# EAGLE board Ink-Board (EAGLE 9.7.0)
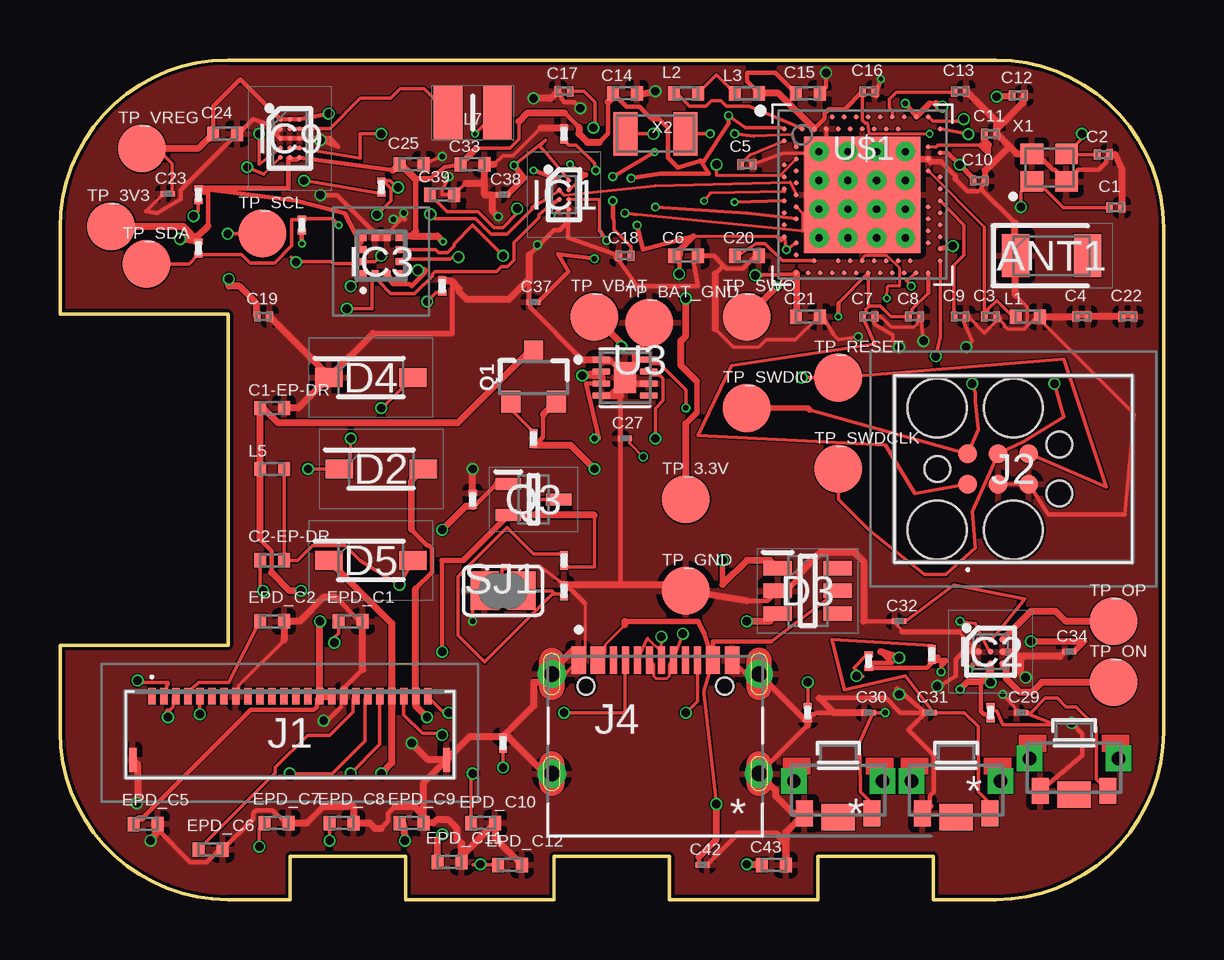
[diagram p0: board, top side]
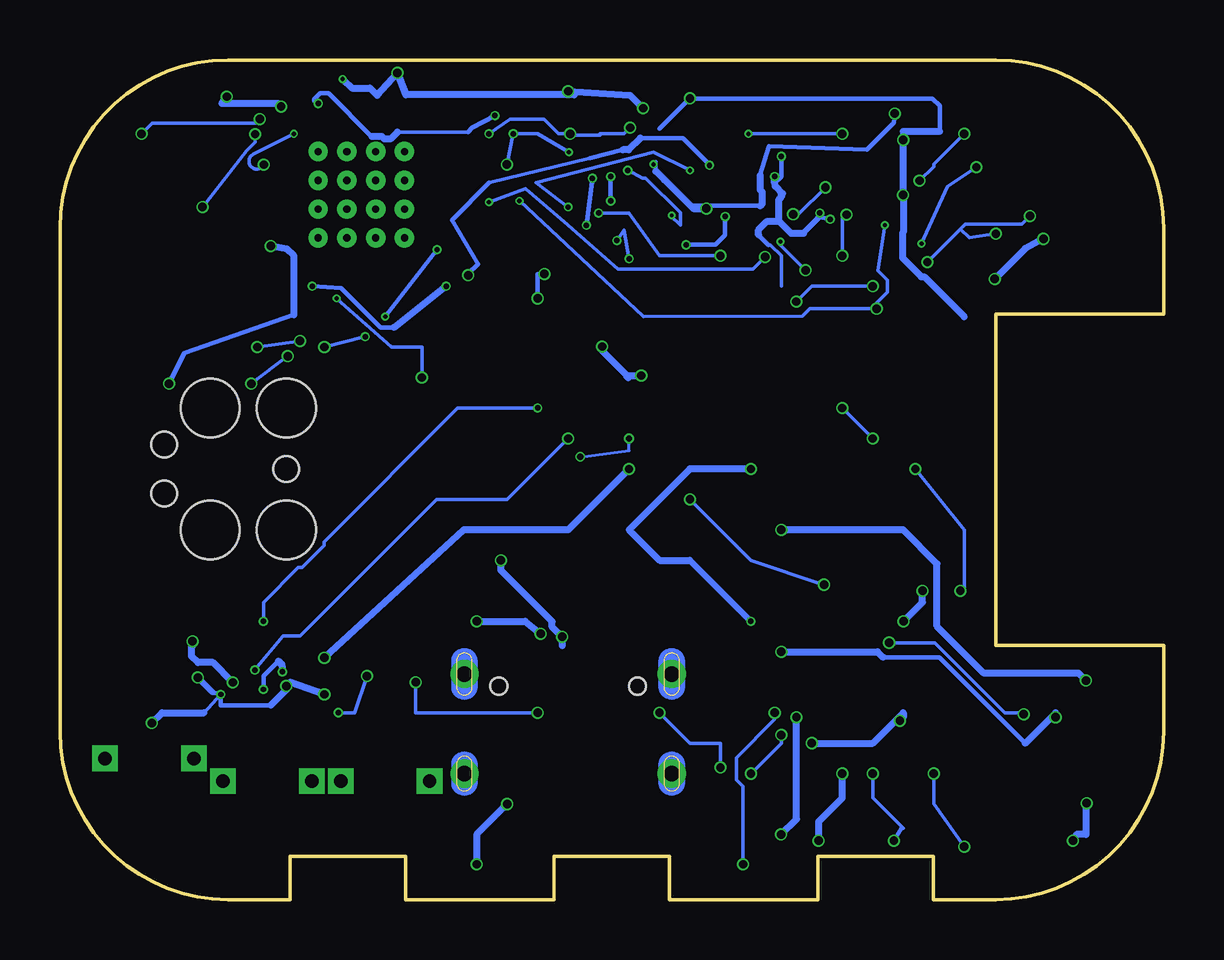
[diagram p1: board, bottom side, seen from below]

Size 46 x 35 mm. Coordinates in mm from the lower left corner, seen from the top.
Outline: 39,0 36.4,0 36.4,1.8 31.6,1.8 31.6,0 25.4,0 25.4,1.8 20.6,1.8 20.6,0 14.4,0 14.4,1.8 9.6,1.8 9.6,0 7,0 arc-90 0,7 0,10.6 7,10.6 7,24.4 0,24.4 0,28 arc-90 7,35 39,35 arc-90 46,28 46,7 arc-90 39,0
Copper layers (1*16): Top 0.035mm / dielectric 1.6mm / Bottom 0.035mm
Design rules "jlcpcb-2layers.dru": minimum track width 5mil, minimum drill 5mil, track to track 2mil, track to pad 0.000003125mm, pad to pad 5mil, via to via 5mil, smd to smd 5mil, copper to edge 5mil, drill to drill 6mil, minimum pad ring 10mil, minimum via ring 3mil, stop-mask expansion 4mil, vias tented up to drill 0mil, thermal gap 10mil

## Footprints (pad centres in the part's own frame; a part is rotated, then mirrored left to right if it is on the bottom)
2450AT18B100E_ANTC3216X140N = smd 1.15 x 1.8: 1 -1.5,0; 2 1.5,0
NORDIC_NRF_3_RESC0201_L = smd 0.28 x 0.43: 1 -0.255,0; 2 0.255,0
NORDIC_NRF_3_RESC0402_L = smd 0.5 x 0.6: 1 -0.5,0; 2 0.5,0
GRM011R60J152KE01L_2_CAPC0201X13N = smd 0.22 x 0.23: 1 -0.185,0; 2 0.185,0
ESP32_C6_LIBRARY_5_SOD3716X135N = smd 1.15 x 0.8: 1 -1.75,0; 2 1.75,0
ESP32_C6_LIBRARY_3_SOT95P280X145-6N = smd 1.2 x 0.6: 1 -1.25,0.95; 2 -1.25,0; 3 -1.25,-0.95; 4 1.25,-0.95; 5 1.25,0; 6 1.25,0.95
BQ25180YBGR_BGA8C40P2X4_100X155X50 = smd 0.2 x 0.2: A1 -0.2,0.6; A2 0.2,0.6; B1 -0.2,0.2; B2 0.2,0.2; C1 -0.2,-0.2; C2 0.2,-0.2; D1 -0.2,-0.6; D2 0.2,-0.6
DRV2605YZFR_BGA9C50P3X3_144X144X62 = smd 0.25 x 0.25: A1 -0.5,0.5; A2 0,0.5; A3 0.5,0.5; B1 -0.5,0; B2 0,0; B3 0.5,0; C1 -0.5,-0.5; C2 0,-0.5; C3 0.5,-0.5
BMA423_BMA423 = smd 0.3 x 0.35: 1 -0.75,-0.775; 2 -0.25,-0.775; 3 0.25,-0.775; 4 0.75,-0.775; 7 0.75,0.775; 8 0.25,0.775; 9 -0.25,0.775; 10 -0.75,0.775 | smd 0.35 x 0.3: 5 0.775,-0.25; 6 0.775,0.25; 11 -0.775,0.25; 12 -0.775,-0.25
RT6160AWSC_BGA15C40P3X5_140X230X60 = smd 0.216 x 0.216: A1 -0.4,0.8; A2 0,0.8; A3 0.4,0.8; B1 -0.4,0.4; B2 0,0.4; B3 0.4,0.4; C1 -0.4,0; C2 0,0; C3 0.4,0; D1 -0.4,-0.4; D2 0,-0.4; D3 0.4,-0.4; E1 -0.4,-0.8; E2 0,-0.8; E3 0.4,-0.8
503480-2400_5034802400 = smd 0.3 x 0.7: 1 -5.75,1.525; 2 -5.25,1.525; 3 -4.75,1.525; 4 -4.25,1.525; 5 -3.75,1.525; 6 -3.25,1.525; 7 -2.75,1.525; 8 -2.25,1.525; 9 -1.75,1.525; 10 -1.25,1.525; 11 -0.75,1.525; 12 -0.25,1.525; 13 0.25,1.525; 14 0.75,1.525; 15 1.25,1.525; 16 1.75,1.525; 17 2.25,1.525; 18 2.75,1.525; 19 3.25,1.525; 20 3.75,1.525; 21 4.25,1.525; 22 4.75,1.525; 23 5.25,1.525; 24 5.75,1.525 | smd 0.3 x 1: MP1 -6.54,-1.125; MP2 6.54,-1.125
TC2030-IDC_TC2030IDC = smd 0.783 x 0.783: 1 -0.953,-0.635; 2 -0.953,0.635; 3 0.317,-0.635; 4 0.317,0.635; 5 1.588,-0.635; 6 1.588,0.635 | hole 2.451: -2.223,-2.54; -2.223,2.54; 0.952,-2.54; 0.952,2.54 | hole 1.067: -2.223,0; 2.857,-1.016; 2.857,1.016
KH-TYPE-C-16P_KINGHELM_KH-TYPE-C-16P = smd 0.6 x 1.15: A1_B12 -3.2,4.725; A4_B9 -2.4,4.725; A9_B4 2.4,4.725; A12_B1 3.2,4.725 | smd 0.3 x 1.15: A5 -1.25,4.725; A6 -0.25,4.725; A7 0.25,4.725; A8 1.25,4.725; B5 1.75,4.725; B6 0.75,4.725; B7 -0.75,4.725; B8 -1.75,4.725 | drill 0.65 pad 1.05: SH1 -4.32,0; SH2 4.32,0; SH3 -4.32,4.15; SH4 4.32,4.15 | hole 0.7: -2.89,3.65; 2.89,3.65
NORDIC_NRF_2_RESC0402_L = smd 0.5 x 0.6: 1 -0.5,0; 2 0.5,0
MLP2016SR47MT0S1_INDC2016X100N = smd 1.2 x 2.2: 1 -1.028,0; 2 1.028,0
ESP32_C6_LIBRARY_4_ESP32_C6_LIBRARY_4_ESP32_C6_LIBRARY_4_ESP32_C6_LIBRARY_4_ESP32_WROVER_SPARKFUN-DISCRETESEMI_SOT23-3 = smd 0.8 x 0.9: 1 -0.95,-1; 2 0.95,-1; 3 0,1.1
ESP32_C6_LIBRARY_6_SOT65P210X110-3N = smd 1.05 x 0.5: 1 -1.05,0.65; 2 -1.05,-0.65; 3 1.05,0
CPF0201D7K68C1_0201 = smd 0.35 x 0.25: 1 0,0.275; 2 0,-0.275
ESP32_C6_LIBRARY_7_JUMPER_SJ = smd 1.168 x 1.6: 1 -0.762,0; 2 0.762,0
2025-10-22_07-23-44_LIBRARY_SW_EVP-AKE31A_PAN = smd 0.711 x 1.092: 1 -1.4,-0.972; 2 1.4,-0.972 | drill 0.559 pad 0.914 square: 3 -1.848,0.381; 4 1.848,0.381 | smd 1.397 x 1.092: 5 0,-1.124
HECTOR_WATCH_1_TP20R = smd 2 x 2: TP 0,0
ESP32_C6_LIBRARY_SON50P200X200X80-9N = smd 0.76 x 0.27: 1 -0.985,0.75; 2 -0.985,0.25; 3 -0.985,-0.25; 4 -0.985,-0.75; 5 0.985,-0.75; 6 0.985,-0.25; 7 0.985,0.25; 8 0.985,0.75 | smd 0.9 x 1.3: 9 0,0
NORDIC_NRF_4_AQFN50P700X700X85_HS-74N = smd 4.85 x 4.85: P$74 0,0 | drill 0.3 pad 0.6: P$75 -1.8,1.8; P$76 -0.6,1.8; P$77 0.6,1.8; P$78 1.8,1.8; P$79 -1.8,0.6; P$80 -0.6,0.6; P$81 0.6,0.6; P$82 1.8,0.6; P$83 -1.8,-0.6; P$84 -0.6,-0.6; P$85 0.6,-0.6; P$86 1.8,-0.6; P$87 -1.8,-1.8; P$88 -0.6,-1.8; P$89 0.6,-1.8; P$90 1.8,-1.8 | smd 0.2 x 0.2: P$A8 -1.25,3.25; P$A10 -0.75,3.25; P$A12 -0.25,3.25; P$A14 0.25,3.25; P$A16 0.75,3.25; P$A18 1.25,3.25; P$A20 1.75,3.25; P$A22 2.25,3.25; P$A23 2.75,3.25; P$AA24 3.25,-2.25; P$AB2 -2.75,-2.5; P$AC5 -2,-2.75; P$AC9 -1,-2.75; P$AC11 -0.5,-2.75; P$AC13 0,-2.75; P$AC15 0.5,-2.75; P$AC17 1,-2.75; P$AC19 1.5,-2.75; P$AC21 2,-2.75; P$AC24 3.25,-2.75; P$AD2 -2.75,-3.25; P$AD4 -2.25,-3.25; P$AD6 -1.75,-3.25; P$AD8 -1.25,-3.25; P$AD10 -0.75,-3.25; P$AD12 -0.25,-3.25; P$AD14 0.25,-3.25; P$AD16 0.75,-3.25; P$AD18 1.25,-3.25; P$AD20 1.75,-3.25; P$AD22 2.25,-3.25; P$AD23 2.75,-3.25; P$B1 -3.25,2.75; P$B3 -2.5,2.75; P$B5 -2,2.75; P$B7 -1.5,2.75; P$B9 -1,2.75; P$B11 -0.5,2.75; P$B13 0,2.75; P$B15 0.5,2.75; P$B17 1,2.75; P$B19 1.5,2.75; P$B24 3.25,2.75; P$C1 -3.25,2.25; P$D2 -2.75,2; P$D23 2.75,2; P$E24 3.25,1.75; P$F2 -2.75,1.5; P$F23 2.75,1.5; P$G1 -3.25,1.25; P$H2 -2.75,1; P$H23 2.75,1; P$J1 -3.25,0.75; P$J24 3.25,0.75; P$K2 -2.75,0.5; P$L1 -3.25,0.25; P$L24 3.25,0.25; P$M2 -2.75,0; P$N1 -3.25,-0.25; P$N24 3.25,-0.25; P$P2 -2.75,-0.5; P$P23 2.75,-0.5; P$R1 -3.25,-0.75; P$R24 3.25,-0.75; P$T2 -2.75,-1; P$T23 2.75,-1; P$U1 -3.25,-1.25; P$U24 3.25,-1.25; P$V23 2.75,-1.5; P$W1 -3.25,-1.75; P$W24 3.25,-1.75; P$Y2 -2.75,-2; P$Y23 2.75,-2
NORDIC_NRF_BT-XTAL_2016_N = smd 0.95 x 0.85: 1 -0.725,-0.575; 2 0.725,-0.575; 3 0.725,0.575; 4 -0.725,0.575
NORDIC_NRF_1_XTAL_3215_N = smd 1 x 1.8: 1 -1.25,0; 2 1.25,0

## Placement (x,y rotation side)
ANT1  2450AT18B100E  [2450AT18B100E_ANTC3216X140N]  41.33,26.84 0 top
C1  12pF  [NORDIC_NRF_3_RESC0201_L]  44.01,28.85 0 top
C1-EP-DR  10uF  [NORDIC_NRF_3_RESC0402_L]  8.84,20.49 0 top
C2  12pF  [NORDIC_NRF_3_RESC0201_L]  43.5,31.06 0 top
C2-EP-DR  4.7uF/25V  [NORDIC_NRF_3_RESC0402_L]  8.84,14.14 0 top
C3  1pF  [NORDIC_NRF_3_RESC0201_L]  38.79,24.3 0 top
C4  1pF  [NORDIC_NRF_3_RESC0201_L]  42.6,24.3 0 top
C5  100nF  [NORDIC_NRF_3_RESC0201_L]  28.63,30.65 0 top
C6  4.7μF  [NORDIC_NRF_3_RESC0402_L]  26.09,26.84 0 top
C7  100nF  [NORDIC_NRF_3_RESC0201_L]  33.71,24.3 0 top
C8  100nF  [NORDIC_NRF_3_RESC0201_L]  35.62,24.3 0 top
C9  820pF  [NORDIC_NRF_3_RESC0201_L]  37.52,24.3 0 top
C10  N.C.  [NORDIC_NRF_3_RESC0201_L]  38.31,29.97 0 top
C11  100pF  [NORDIC_NRF_3_RESC0201_L]  38.79,31.92 0 top
C12  100nF  [NORDIC_NRF_3_RESC0201_L]  39.95,33.52 0 top
C13  N.C.  [NORDIC_NRF_3_RESC0201_L]  37.52,33.69 0 top
C14  4.7μF  [NORDIC_NRF_3_RESC0402_L]  23.55,33.61 0 top
C15  1.0μF  [NORDIC_NRF_3_RESC0402_L]  31.17,33.61 0 top
C16  47nF  [NORDIC_NRF_3_RESC0201_L]  33.71,33.69 0 top
C17  12pF  [NORDIC_NRF_3_RESC0201_L]  21.01,33.69 0 top
C18  12pF  [NORDIC_NRF_3_RESC0201_L]  23.55,26.84 0 top
C19  100nF  [NORDIC_NRF_3_RESC0201_L]  8.49,24.3 0 top
C20  4.7μF  [NORDIC_NRF_3_RESC0402_L]  28.63,26.84 0 top
C21  4.7μF  [NORDIC_NRF_3_RESC0402_L]  31.17,24.3 0 top
C22  N.C.  [NORDIC_NRF_3_RESC0201_L]  44.51,24.3 0 top
C23  0.1uF  [GRM011R60J152KE01L_2_CAPC0201X13N]  4.5,29.42 0 top
C24  10uF  [NORDIC_NRF_3_RESC0402_L]  6.88,31.92 0 top
C25  22uF  [NORDIC_NRF_3_RESC0402_L]  14.66,30.65 0 top
C27  0.1uF  [GRM011R60J152KE01L_2_CAPC0201X13N]  23.55,19.22 0 top
C29  1uF  [GRM011R60J152KE01L_2_CAPC0201X13N]  40.06,7.79 0 top
C30  1uF  [GRM011R60J152KE01L_2_CAPC0201X13N]  33.71,7.79 0 top
C31  1uF  [GRM011R60J152KE01L_2_CAPC0201X13N]  36.25,7.79 0 top
C32  1uF  [GRM011R60J152KE01L_2_CAPC0201X13N]  34.98,11.6 0 top
C33  22uF  [NORDIC_NRF_3_RESC0402_L]  17.2,30.65 0 top
C34  0.1uF  [GRM011R60J152KE01L_2_CAPC0201X13N]  42.07,10.33 0 top
C37  1uF  [GRM011R60J152KE01L_2_CAPC0201X13N]  19.74,24.9 0 top
C38  1uF  [GRM011R60J152KE01L_2_CAPC0201X13N]  18.47,29.38 0 top
C39  10uF  [NORDIC_NRF_3_RESC0402_L]  15.93,29.38 0 top
C42  0.1uF  [GRM011R60J152KE01L_2_CAPC0201X13N]  26.79,1.44 0 top
C43  4.7uF  [NORDIC_NRF_3_RESC0402_L]  29.76,1.44 0 top
D2  MBR0530  [ESP32_C6_LIBRARY_5_SOD3716X135N]  13.39,17.95 0 top
D3  USBLC6-2SC6Y  [ESP32_C6_LIBRARY_3_SOT95P280X145-6N]  31.17,12.87 0 top
D4  MBR0530  [ESP32_C6_LIBRARY_5_SOD3716X135N]  12.96,21.76 0 top
D5  MBR0530  [ESP32_C6_LIBRARY_5_SOD3716X135N]  12.96,14.14 0 top
EPD_C1  1uF/50V  [NORDIC_NRF_3_RESC0402_L]  12.12,11.6 0 top
EPD_C2  1uF/50V  [NORDIC_NRF_3_RESC0402_L]  8.84,11.6 0 top
EPD_C5  0.1uF/50V  [NORDIC_NRF_3_RESC0402_L]  3.57,3.15 0 top
EPD_C6  1uF/50V  [NORDIC_NRF_3_RESC0402_L]  6.28,2.08 0 top
EPD_C7  1uF/50V  [NORDIC_NRF_3_RESC0402_L]  9.03,3.19 0 top
EPD_C8  1uF/50V  [NORDIC_NRF_3_RESC0402_L]  11.74,3.19 0 top
EPD_C9  1uF/50V  [NORDIC_NRF_3_RESC0402_L]  14.66,3.19 0 top
EPD_C10  1uF/50V  [NORDIC_NRF_3_RESC0402_L]  17.64,3.19 0 top
EPD_C11  1uF/50V  [NORDIC_NRF_3_RESC0402_L]  16.24,1.56 0 top
EPD_C12  1uF/50V  [NORDIC_NRF_3_RESC0402_L]  18.76,1.44 0 top
IC1  BQ25180YBGR  [BQ25180YBGR_BGA8C40P2X4_100X155X50]  21.01,29.38 0 top
IC2  DRV2605YZFR  [DRV2605YZFR_BGA9C50P3X3_144X144X62]  38.79,10.33 0 top
IC3  BMA423  [BMA423_BMA423]  13.39,26.84 0 top
IC9  RT6160AWSC  [RT6160AWSC_BGA15C40P3X5_140X230X60]  9.58,31.73 0 top
J1  503480-2400  [503480-2400_5034802400]  9.58,6.95 0 top
J2  TC2030-IDC  [TC2030-IDC_TC2030IDC]  38.79,17.95 0 top
J4  KH-TYPE-C-16P  [KH-TYPE-C-16P_KINGHELM_KH-TYPE-C-16P]  24.82,5.25 0 top
L1  3.9nH  [NORDIC_NRF_2_RESC0402_L]  40.35,24.3 0 top
L2  10μH  [NORDIC_NRF_2_RESC0402_L]  26.09,33.61 0 top
L3  15nH  [NORDIC_NRF_2_RESC0402_L]  28.63,33.61 0 top
L5  68uH  [NORDIC_NRF_2_RESC0402_L]  8.84,17.95 0 top
L7  FTC252012SR47MBCA  [MLP2016SR47MT0S1_INDC2016X100N]  17.2,32.81 0 top
Q1  20V/4.2A/52mΩ/1.4W  [ESP32_C6_LIBRARY_4_ESP32_C6_LIBRARY_4_ESP32_C6_LIBRARY_4_ESP32_C6_LIBRARY_4_ESP32_WROVER_SPARKFUN-DISCRETESEMI_SOT23-3]  19.74,21.76 0 top
Q3  SI1308EDL-T1-GE3  [ESP32_C6_LIBRARY_6_SOT65P210X110-3N]  19.74,16.68 0 top
R1_EP_DR  0.47  [CPF0201D7K68C1_0201]  21.01,14.14 0 top
R1_USB  5K1  [CPF0201D7K68C1_0201]  18.47,6.52 0 top
R2  0  [CPF0201D7K68C1_0201]  10.08,28.11 0 top
R2_EP_DR  10K  [CPF0201D7K68C1_0201]  17.2,16.68 0 top
R2_USB  5K1  [CPF0201D7K68C1_0201]  31.17,7.79 0 top
R3  0  [CPF0201D7K68C1_0201]  15.93,25.57 0 top
R4  0  [CPF0201D7K68C1_0201]  13.39,29.7 0 top
R5  10K  [CPF0201D7K68C1_0201]  33.71,9.94 0 top
R7  10K  [CPF0201D7K68C1_0201]  38.79,7.79 0 top
R8  10K  [CPF0201D7K68C1_0201]  36.35,10.22 0 top
R9  10K  [CPF0201D7K68C1_0201]  21.01,31.92 0 top
R17  3K3  [CPF0201D7K68C1_0201]  5.77,29.38 0 top
R18  3K3  [CPF0201D7K68C1_0201]  5.77,27.16 0 top
R_PWR_EPD  10K  [CPF0201D7K68C1_0201]  19.74,19.22 0 top
R_TYPE_SEL  2.2  [CPF0201D7K68C1_0201]  21.01,12.87 0 top
SJ1  [ESP32_C6_LIBRARY_7_JUMPER_SJ]  18.47,12.87 0 top
SW_DN  2025-10-22_07-23-44_LIBRARY_EVP-AKE31ASW_EVP-AKE31A_PAN  [2025-10-22_07-23-44_LIBRARY_SW_EVP-AKE31A_PAN]  42.27,5.5 0 top
SW_ENT  2025-10-22_07-23-44_LIBRARY_EVP-AKE31ASW_EVP-AKE31A_PAN  [2025-10-22_07-23-44_LIBRARY_SW_EVP-AKE31A_PAN]  37.35,4.56 0 top
SW_UP  2025-10-22_07-23-44_LIBRARY_EVP-AKE31ASW_EVP-AKE31A_PAN  [2025-10-22_07-23-44_LIBRARY_SW_EVP-AKE31A_PAN]  32.44,4.56 0 top
TP_3.3V  HECTOR_WATCH_1_TPTP20R  [HECTOR_WATCH_1_TP20R]  26.09,16.68 0 top
TP_3V3  HECTOR_WATCH_1_TPTP20R  [HECTOR_WATCH_1_TP20R]  2.13,28.06 0 top
TP_BAT_GND  HECTOR_WATCH_1_TPTP20R  [HECTOR_WATCH_1_TP20R]  24.57,24.05 0 top
TP_GND  HECTOR_WATCH_1_TPTP20R  [HECTOR_WATCH_1_TP20R]  26.09,12.87 0 top
TP_ON  HECTOR_WATCH_1_TPTP20R  [HECTOR_WATCH_1_TP20R]  43.91,9.06 0 top
TP_OP  HECTOR_WATCH_1_TPTP20R  [HECTOR_WATCH_1_TP20R]  43.91,11.6 0 top
TP_RESET  HECTOR_WATCH_1_TPTP20R  [HECTOR_WATCH_1_TP20R]  32.44,21.76 0 top
TP_SCL  HECTOR_WATCH_1_TPTP20R  [HECTOR_WATCH_1_TP20R]  8.44,27.76 0 top
TP_SDA  HECTOR_WATCH_1_TPTP20R  [HECTOR_WATCH_1_TP20R]  3.61,26.49 0 top
TP_SWDCLK  HECTOR_WATCH_1_TPTP20R  [HECTOR_WATCH_1_TP20R]  32.44,17.95 0 top
TP_SWDIO  HECTOR_WATCH_1_TPTP20R  [HECTOR_WATCH_1_TP20R]  28.63,20.49 0 top
TP_SWO  HECTOR_WATCH_1_TPTP20R  [HECTOR_WATCH_1_TP20R]  28.63,24.3 0 top
TP_VBAT  HECTOR_WATCH_1_TPTP20R  [HECTOR_WATCH_1_TP20R]  22.28,24.3 0 top
TP_VREG  HECTOR_WATCH_1_TPTP20R  [HECTOR_WATCH_1_TP20R]  3.42,31.31 0 top
U3  MAX17048G+T10  [ESP32_C6_LIBRARY_SON50P200X200X80-9N]  23.55,21.76 0 top
U$1  NRF52840_QF  [NORDIC_NRF_4_AQFN50P700X700X85_HS-74N]  33.44,29.38 0 top
X1  32MHz  [NORDIC_NRF_BT-XTAL_2016_N]  41.23,30.51 0 top
X2  32.768kHz  [NORDIC_NRF_1_XTAL_3215_N]  24.82,31.92 0 top

## Library data of the parts
ANT1 = InkTime_v5; ARROW_PART_NUMBER: 2450AT18B100E; ARROW_PRICE-STOCK: https://www.arrow.com/en/products/2450at18b100e/johanson-dielectrics?utm_currency=USD&region=nac; DESCRIPTION: Antennas 2.45GHz ANTENNA; HEIGHT: 1.4mm; MANUFACTURER_NAME: JOHANSON TECHNOLOGY; MANUFACTURER_PART_NUMBER: 2450AT18B100E; MOUSER_PART_NUMBER: 609-2450AT18B100E; MOUSER_PRICE-STOCK: https://www.mouser.co.uk/ProductDetail/Johanson-Technology/2450AT18B100E?qs=yCnrNFeXz%252Bh5MFsFIXGZGA%3D%3D
C1 C1-EP-DR C2 C2-EP-DR C3-C22 C24 C25 C33 C39 C43 EPD_C1 EPD_C2 EPD_C5-EPD_C12 L1-L3 L5 R1_EP_DR R1_USB R2 R2_EP_DR R2_USB R3-R5 R7-R9 R17 R18 R_PWR_EPD R_TYPE_SEL SJ1 TP_3.3V TP_3V3 TP_BAT_GND TP_GND TP_ON TP_OP TP_RESET TP_SCL TP_SDA TP_SWDCLK TP_SWDIO TP_SWO TP_VBAT TP_VREG U$1 X1 X2 = InkTime_v5
C23 C27 C29-C32 C34 C37 C38 C42 = InkTime_v5; AVAILABILITY: In Stock; CHECK_PRICES: https://www.snapeda.com/parts/GRM011R60J152KE01L/Murata/view-part/?ref=eda; DESCRIPTION: SMD Capacitor X5R(EIA) with Capacitance: 1500pF Tol. 10%. Rated Voltage: 6.3Vdc; MF: Murata; MP: GRM011R60J152KE01L; PACKAGE: 0201 Murata; PRICE: None; SNAPEDA_LINK: https://www.snapeda.com/parts/GRM011R60J152KE01L/Murata/view-part/?ref=snap
D2 D4 D5 = InkTime_v5; AVAILABILITY: In Stock; CHECK_PRICES: https://www.snapeda.com/parts/MBR0530/Onsemi/view-part/?ref=eda; DESCRIPTION: Diode Schottky 30 V 500mA Surface Mount SOD-123; MF: ON Semiconductor; MP: MBR0530; PACKAGE: SOD-123-2 ON Semiconductor; PRICE: None; PURCHASE-URL: https://www.snapeda.com/api/url_track_click_mouser/?unipart_id=179458&manufacturer=ON Semiconductor&part_name=MBR0530&search_term=None; SNAPEDA_LINK: https://www.snapeda.com/parts/MBR0530/Onsemi/view-part/?ref=snap
D3 = InkTime_v5; AVAILABILITY: In Stock; CHECK_PRICES: https://www.snapeda.com/parts/USBLC6-2SC6Y/STMicroelectronics/view-part/?ref=eda; DESCRIPTION: 17V Clamp 5A (8/20µs) Ipp Tvs Diode Surface Mount SOT-23-6; MF: STMicroelectronics; MP: USBLC6-2SC6Y; PACKAGE: SOT-23-6 STMicroelectronics; PRICE: None; SNAPEDA_LINK: https://www.snapeda.com/parts/USBLC6-2SC6Y/STMicroelectronics/view-part/?ref=snap
IC1 = InkTime_v5; ARROW_PART_NUMBER: BQ25180YBGR; ARROW_PRICE-STOCK: https://www.arrow.com/en/products/bq25180ybgr/texas-instruments?utm_currency=USD&region=nac; DESCRIPTION: Charger IC Lithium Ion/Polymer, Lithium Iron Phosphate 8-DSBGA (1.6x1.1); HEIGHT: 0.5mm; MANUFACTURER_NAME: Texas Instruments; MANUFACTURER_PART_NUMBER: BQ25180YBGR; MOUSER_PART_NUMBER: 595-BQ25180YBGR; MOUSER_PRICE-STOCK: https://www.mouser.co.uk/ProductDetail/Texas-Instruments/BQ25180YBGR?qs=doiCPypUmgEWjAK%252BJAX6Tw%3D%3D
IC2 = InkTime_v5; ARROW_PART_NUMBER: DRV2605YZFR; ARROW_PRICE-STOCK: https://www.arrow.com/en/products/drv2605yzfr/texas-instruments?region=nac; DESCRIPTION: Haptic Driver for ERM/LRA with Built-In Library and Smart Loop Architecture; HEIGHT: 0.625mm; MANUFACTURER_NAME: Texas Instruments; MANUFACTURER_PART_NUMBER: DRV2605YZFR
IC3 = InkTime_v5; ARROW_PART_NUMBER: BMA423; ARROW_PRICE-STOCK: https://www.arrow.com/en/products/bma423/bosch; DESCRIPTION: Accelerometers Triaxial low-g 12bit Acceleration Sensor; HEIGHT: 1mm; MANUFACTURER_NAME: BOSCH; MANUFACTURER_PART_NUMBER: BMA423; MOUSER_PART_NUMBER: 262-BMA423; MOUSER_PRICE-STOCK: https://www.mouser.co.uk/ProductDetail/Bosch-Sensortec/BMA423?qs=HXFqYaX1Q2xC%252BSgeGoX3mg%3D%3D
IC9 = InkTime_v5; DESCRIPTION: Buck-Boost Regulator Positive Output Step-Up/Step-Down I2C DC-DC Controller IC 15-WL-CSP (BSC) (1.4x2.3); HEIGHT: 0.6mm; MANUFACTURER_NAME: RICHTEK; MANUFACTURER_PART_NUMBER: RT6160AWSC; MOUSER_PART_NUMBER: 835-RT6160AWSC; MOUSER_PRICE-STOCK: https://www.mouser.co.uk/ProductDetail/Richtek/RT6160AWSC?qs=amGC7iS6iy%2FLd9PSoixZXQ%3D%3D
J1 = InkTime_v5; DESCRIPTION: FFC & FPC Connectors 0.5mm FPC RA SMT Dual Contact 24Ckt; HEIGHT: 1.87mm; MANUFACTURER_NAME: Molex; MANUFACTURER_PART_NUMBER: 503480-2400; MOUSER_PART_NUMBER: 538-503480-2400; MOUSER_PRICE-STOCK: https://www.mouser.co.uk/ProductDetail/Molex/503480-2400?qs=OAhjpuo3Vu7efIoxFh9AOw%3D%3D
J2 = InkTime_v5; DESCRIPTION: CABLE ADAPTER 6 POS; HEIGHT: 19mm; MANUFACTURER_NAME: Tag Connect; MANUFACTURER_PART_NUMBER: TC2030-IDC
J4 = InkTime_v5; AVAILABILITY: Not in stock; CHECK_PRICES: https://www.snapeda.com/parts/KH-TYPE-C-16P/Kinghelm/view-part/?ref=eda; MF: kinghelm; MP: KH-TYPE-C-16P; PACKAGE: None; PRICE: None; SNAPEDA_LINK: https://www.snapeda.com/parts/KH-TYPE-C-16P/Kinghelm/view-part/?ref=snap
L7 = InkTime_v5; DESCRIPTION: SMD / SMT Inductors (Coils), L=0.47?H, L x W x T :; HEIGHT: 1mm; JLCPCB: https://jlcpcb.com/partdetail/6763488-FTC252012SR47MBCA/C5832368; MANUFACTURER_NAME: TDK; MANUFACTURER_PART_NUMBER: FTC252012SR47MBCA
Q1 = InkTime_v5; PROD_ID: TRAN-14388
Q3 = InkTime_v5; AVAILABILITY: In Stock; CHECK_PRICES: https://www.snapeda.com/parts/SI1308EDL-T1-GE3/Vishay+Siliconix/view-part/?ref=eda; DESCRIPTION: Si1308EDL-T1-GE3 N-channel MOSFET Transistor, 1.5 A, 30 V, 3-Pin SC-70 | Siliconix / Vishay SI1308EDL-T1-GE3; MF: Vishay Siliconix; MP: SI1308EDL-T1-GE3; PACKAGE: SOT-323 Vishay Semiconductor; PRICE: None; PURCHASE-URL: https://www.snapeda.com/api/url_track_click_mouser/?unipart_id=274603&manufacturer=Vishay Siliconix&part_name=SI1308EDL-T1-GE3&search_term=None; SNAPEDA_LINK: https://www.snapeda.com/parts/SI1308EDL-T1-GE3/Vishay+Siliconix/view-part/?ref=snap
SW_DN SW_ENT SW_UP = InkTime_v5; COPYRIGHT: Copyright (C) 2025 Ultra Librarian. All rights reserved.; DIGI-KEY_PART_NUMBER_1: P123437TR-ND; DIGI-KEY_PART_NUMBER_2: P123437CT-ND; DIGI-KEY_PART_NUMBER_3: P123437DKR-ND; MANUFACTURER_NAME: Panasonic; MANUFACTURER_PART_NUMBER: EVP-AKE31A
U3 = InkTime_v5; AVAILABILITY: In Stock; CHECK_PRICES: https://www.snapeda.com/parts/MAX17048G+T10/Analog+Devices/view-part/?ref=eda; DESCRIPTION: 3µA 1-Cell/2-Cell Fuel Gauge with ModelGauge; MF: Analog Devices; MP: MAX17048G+T10; PACKAGE: TDFN-8 Maxim; PRICE: None; PURCHASE-URL: https://www.snapeda.com/api/url_track_click_mouser/?unipart_id=329239&manufacturer=Analog Devices&part_name=MAX17048G+T10&search_term=None; SNAPEDA_LINK: https://www.snapeda.com/parts/MAX17048G+T10/Analog+Devices/view-part/?ref=snap

## Nets
3V3/1.7D: C34.2 IC2.C2 Q1.2 R5.2 R7.2 R8.2 R_PWR_EPD.2
3V3/2.4A: C6.1 C7.1 C8.1 C12.1 C14.1 C19.1 C25.1 C33.1 IC3.3 IC3.7 IC3.10 IC9.E2 IC9.E3 J2.1 R17.1 R18.1 TP_3.3V.TP TP_3V3.TP U$1.P$A22 U$1.P$AD14 U$1.P$AD23 U$1.P$B1 U$1.P$W1 U$1.P$Y2
ALERT/1.6C: U3.5
ALERT/2.5C: U$1.P$J24
D+/1.5D: D3.4
D+/2.7D: U$1.P$AD6
D-/1.5D: D3.6
D-/2.7D: U$1.P$AD4
DEC1: C5.1 U$1.P$C1
DEC3: C11.1 U$1.P$D23
DEC4_6: C10.1 C15.1 C16.1 L3.2 U$1.P$B5 U$1.P$E24
DN: D3.1 J4.A7 J4.B7
DP: D3.3 J4.A6 J4.B6
EPD_3V3: C1-EP-DR.1 EPD_C5.1 J1.15 J1.16 L5.1 Q1.3
EPD_BUSY/1.5D: J1.9
EPD_BUSY/2.2D: U$1.P$AD12
EPD_CS/1.4C: J1.12
EPD_CS/2.2D: U$1.P$K2
EPD_DC/1.5D: J1.11
EPD_DC/2.2D: U$1.P$AD10
EPD_RST/1.5D: J1.10
EPD_RST/2.2D: U$1.P$AC11
GDR: J1.2 Q3.1 R2_EP_DR.2
GND: ANT1.1 C1-EP-DR.2 C1.2 C2.2 C3.2 C4.1 C4.2 C5.2 C6.2 C7.2 C8.2 C9.2 C10.2 C11.2 C12.2 C13.2 C14.2 C15.2 C16.2 C17.1 C18.1 C19.2 C20.2 C21.2 C22.1 C22.2 C23.1 C24.2 C25.2 C27.1 C29.1 C30.1 C31.1 C32.1 C33.2 C34.1 C37.1 C38.1 C39.2 C42.2 C43.2 D3.2 D4.1 EPD_C1.2 EPD_C2.2 EPD_C5.2 EPD_C6.2 EPD_C7.2 EPD_C8.2 EPD_C9.2 EPD_C10.2 EPD_C11.2 EPD_C12.2 IC1.D2 IC2.B1 IC2.B3 IC3.8 IC3.9 IC9.B1 IC9.C1 IC9.C2 IC9.C3 J1.8 J1.17 J1.MP1 J1.MP2 J2.3 J2.5 J4.A1_B12 J4.A12_B1 J4.SH1 J4.SH2 J4.SH3 J4.SH4 L1.2 R1_USB.1 R2_EP_DR.1 R2_USB.2 R3.1 R9.1 R_TYPE_SEL.1 SJ1.1 SW_DN.1 SW_ENT.1 SW_UP.1 TP_BAT_GND.TP TP_GND.TP U3.1 U3.4 U3.6 U3.9 U$1.P$74 U$1.P$75 U$1.P$76 U$1.P$77 U$1.P$78 U$1.P$79 U$1.P$80 U$1.P$81 U$1.P$82 U$1.P$83 U$1.P$84 U$1.P$85 U$1.P$86 U$1.P$87 U$1.P$88 U$1.P$89 U$1.P$90 U$1.P$B7 U$1.P$F23 X1.2 X1.4
HAPTIC_EN/1.4C: IC2.A1
HAPTIC_EN/2.6A: U$1.P$U1
IMU_INT1: IC3.5 U$1.P$N1
IMU_INT2: IC3.6 U$1.P$P2
LX1: IC9.B2 IC9.B3 L7.1
LX2: IC9.D2 IC9.D3 L7.2
MOSI/1.5B: J1.14
MOSI/2.2D: U$1.P$B13
N$3: C9.1 U$1.P$N24
N$4: C3.1 L1.1 U$1.P$H23
N$5: C1.1 U$1.P$B24 X1.1
N$8: C2.1 U$1.P$A23 X1.3
N$13: C13.1 U$1.P$A18
N$15: L2.1 U$1.P$B3
N$16: L2.2 L3.1
N$19: C20.1 U$1.P$AC5
N$20: C2-EP-DR.2 D5.2 L5.2 Q3.3
N$21: IC9.D1 R4.2
N$22: IC1.D1 R9.2
N$23: C2-EP-DR.1 D2.1 D4.2
N$24: IC9.E1 R2.2
N$25: EPD_C2.1 J1.4
N$26: R1_EP_DR.1 R_TYPE_SEL.2 SJ1.2
N$27: IC3.1 R3.2
N$28: EPD_C6.1 J1.18
N$29: EPD_C7.1 J1.19
N$30: EPD_C8.1 J1.20
N$31: EPD_C1.1 J1.5
N$32: EPD_C10.1 J1.22
N$34: EPD_C12.1 J1.24
N$35: C32.2 IC2.A2
N$38: J4.B5 R2_USB.1
N$42: J4.A5 R1_USB.2
OUT+: IC2.A3 TP_OP.TP
OUT-: IC2.C3 TP_ON.TP
P0.00/XL1: C17.2 U$1.P$D2 X2.1
P0.01/XL2: C18.2 U$1.P$F2 X2.2
P0.04: U$1.P$J1
P0.09: U$1.P$L24
P0.13/1.5D: C30.2 R5.1 SW_UP.2
P0.13/2.6C: U$1.P$AD8
P0.14/1.5D: C31.2 R8.1 SW_ENT.2
P0.14/2.7C: U$1.P$AC9
P0.19: U$1.P$AC15
P0.20: U$1.P$AD16
P0.21: U$1.P$AC17
P0.22: U$1.P$AD18
P0.23: U$1.P$AC19
P0.24: U$1.P$AD20
P0.25: U$1.P$AC21
P0.26: U$1.P$G1
P0.27: U$1.P$H2
P0.28: U$1.P$B11
P0.29: U$1.P$A10
P0.30: U$1.P$B9
P0.31: U$1.P$A8
P1.01/1.6C: Q1.1 R_PWR_EPD.1
P1.01/2.4B: U$1.P$Y23
P1.02/1.6C: C29.2 R7.1 SW_DN.2
P1.02/2.8C: U$1.P$W24
P1.03: U$1.P$V23
P1.04: U$1.P$U24
P1.05: U$1.P$T23
P1.06: U$1.P$R24
P1.07: U$1.P$P23
P1.09: U$1.P$R1
P1.10: U$1.P$A20
P1.11: U$1.P$B19
P1.12: U$1.P$B17
P1.13: U$1.P$A16
P1.14: U$1.P$B15
P1.15: U$1.P$A14
PMIC_INT: IC1.A1 U$1.P$T2
PREVGH: D5.1 EPD_C9.1 J1.21
PREVGL: D2.2 EPD_C11.1 J1.23
RESE: J1.3 Q3.2 R1_EP_DR.2
RESET: J2.6 TP_RESET.TP U$1.P$AC13
SCK/1.5B: J1.13
SCK/2.2D: U$1.P$A12
SCL/1.4C: IC2.C1 U3.7
SCL/2.4C: IC1.B1 IC3.12 R4.1 R17.2 TP_SCL.TP U$1.P$M2
SDA/1.4C: IC2.B2 U3.8
SDA/2.4C: IC1.C1 IC3.2 R2.1 R18.2 TP_SDA.TP U$1.P$L1
SWDCLK: J2.4 TP_SWDCLK.TP U$1.P$AA24
SWDIO: J2.2 TP_SWDIO.TP U$1.P$AC24
SWO: TP_SWO.TP U$1.P$AD22
VBAT/1.2A: C27.2 TP_VBAT.TP U3.2 U3.3
VBAT/2.5C: C37.2 IC1.C2
VBUS/1.5D: C42.1 C43.1 D3.5 J4.A4_B9 J4.A9_B4
VBUS/2.6D: C21.1 C38.2 IC1.A2 U$1.P$AD2
VREG: C23.2 C24.1 C39.1 IC1.B2 IC9.A1 IC9.A2 IC9.A3 TP_VREG.TP

## Tracks (layer width: path | path; a pad name or v marks a point on that pad's centre or on a via)
3V3/1.7D  (via drill 0.23, 0.35)
  Top 0.178: R_PWR_EPD.2 19.94,19.14 20.01,19.14 20.14,19.27 20.14,20.21 | 34.22,10.33 34.69,9.86 33.91,9.86 R5.2 36.14,9.66 36.61,10.14 36.42,10.14 36.35,10.06 R8.2 | R7.2 38.59,7.71 38.52,7.71 38.39,7.84 38.39,9.07 | 36.75,9.81 v36.73,9.49
  Top 0.229: C34.2 42.7,10.77 | 36.38,9.97 36.92,9.97 36.75,9.81
  Top 0.279: 42.7,10.77 v40.48,10.77
  Top 0.3: 20.14,20.21 Q1.2 | R_PWR_EPD.2 21.29,18.95 v22.28,17.95 | v34.98,10.08 34.22,10.33 | IC2.C2 38.79,9.56 38.74,9.51 | IC2.C2 v38.79,9.06 v38.8,9.05 | R8.2 36.38,9.97 | 38.39,9.07 38.74,9.42 38.74,9.51 | IC2.C2 38.74,9.78 38.74,9.51 | 38.39,9.07 | v37.52,8.76 37.83,9.07 38.39,9.07
  Bottom 0.178: v37.52,8.76 37.52,9.31 36.89,9.94
  Bottom 0.3: v22.28,17.95 24.82,15.41 29.17,15.41 v34.98,10.08 | 36.89,9.94 36.75,9.81 v36.73,9.49 | v38.8,9.05 39.62,9.88 40.25,9.88 40.51,10.14 40.51,10.52 40.48,10.56 v40.48,10.77
3V3/2.4A  (via drill 0.18, 0.23, 0.35)
  Top 0.127: U$1.P$B1 30.06,32.17
  Top 0.15: 30.06,32.17 28.57,32.17 | J2.1 35.62,16.93 34.41,18.95 26.6,19.35 28,22.27 | U$1.P$W1 v30.28,27.09 U$1.P$Y2
  Top 0.152: 14.19,27.66 IC3.7 | 29.9,27.63 26.41,27.66 | 33.69,24.7 33.6,24.61 33.6,24.44 C7.1 33.96,23.16 28,22.27 | 33.69,24.7 U$1.P$AD14 32.44,24.87 | 28.57,32.17 v27.87,32.68 | 33.69,24.7 33.73,24.74 34.2,24.74 34.64,24.3 C8.1 35.51,24.44 35.51,24.61 36.19,25.29 | 19.13,32.44 19.13,31.69 18.77,31.32 18.33,31.32 18.33,31.31 17.36,31.31 | 26.85,30.79 27.87,32.34
  Top 0.178: 9.92,30.87 IC9.E3 13.88,30.4 | 6.17,28.08 6.17,29.46 5.97,29.46 R17.1 9.83,29.13 11.87,28.62 12.53,27.35 IC3.10 | 9.52,29.66 8.38,29.66 | 14.89,30.04 14.29,30.65 | 21.04,32.79 21.63,32.2 | 15.43,30.04 16.03,30.52 C33.1 | U$1.P$A22 v35.23,33.19 | 36.25,33.19 36.51,33.19 | C14.1 23.61,33.05 24.16,33.05 24.69,32.53 24.99,32.53 25.34,32.17 25.34,30.92 25.76,30.51 26.1,30.61 26.66,30.79 | U$1.P$W1 30.06,27.5 29.9,27.63 | 25.84,27.09 C6.1 | 26.41,27.66 24.31,27.09 v24.06,28.11 | 36.19,25.29 U$1.P$AD23 | v25.81,26.08 25.84,26.87 | 26.66,30.79 26.7,30.8 27.05,30.27 25.02,30.27 v23.8,30.07 | 22.49,31.57 22.84,31.92 22.84,33.24 | IC3.3 13.76,25.94 13.76,25.79 13.89,25.66 14.57,25.66 14.66,25.57 15.22,26.13 15.22,26.19 15.18,26.23 | 26.66,30.79 26.85,30.79 | v27.87,32.68 27.87,32.34 | 32.44,24.87 v32.44,24.3
  Top 0.203: 9.52,30.87 IC9.E2 | 9.52,30.87 9.92,30.87 | 9.52,30.87 9.52,29.66
  Top 0.229: 8.38,29.66 R17.1 | 15.43,30.04 14.89,30.04 | 36.25,33.19 U$1.P$A22 | 26.41,27.66 25.84,27.09 | 14.83,27.85 14.83,29.98 C25.1 | 26.09,19.85 26.54,20.3 26.54,21.6
  Top 0.3: TP_3V3.TP 5.14,28.06 R18.1 v5.01,27.54 5.77,27.68 6.17,28.08 | C19.1 8.17,24.36 8.17,24.88 7.48,25.57 7.04,25.57 v7.04,25.87 | 14.29,30.65 C25.1 13.88,30.4 | C33.1 17.36,31.31 | C14.1 23.05,33.45 22.84,33.24 | 19.13,32.44 19.49,32.79 21.04,32.79 | v36.78,33.06 36.64,33.06 36.51,33.19 | v39.04,33.47 39.58,33.52 C12.1 | v26.09,25.06 26.09,23.5 25.88,23.29 25.88,22.27 26.54,21.6 | 25.84,26.87 25.84,27.09 | 21.63,32.2 21.63,31.92 21.98,31.57 22.49,31.57 | 15.18,26.23 v14.92,26.23 | 14.83,27.85 14.65,27.66 | 14.65,27.66 14.19,27.66 | 14.65,27.66 15.73,27.66 v15.97,27.43 | TP_3.3V.TP 26.09,19.85
  Bottom 0.152: 28.99,31.99 31.93,31.99 | v14.92,26.23 15.97,27.28 v15.97,27.43
  Bottom 0.178: v27.87,32.68 28.81,32.17 28.99,31.99 | v26.09,25.06 26.09,26.08 v25.81,26.08 | v30.28,27.09 v32.44,24.3 | v35.23,33.19 35.4,33.31 35.4,33.36 35.15,33.61 34.81,33.61 33.01,31.8 | v23.8,30.07 v24.06,28.11
  Bottom 0.3: v7.04,25.87 5.77,27.14 v5.01,27.54 | v36.78,33.06 36.91,33.19 39.25,33.19 v39.04,33.47 | 31.93,31.99 32.22,31.7 32.48,31.7 32.58,31.8 33.01,31.8
DEC1
  Top 0.127: 28.78,31.06 U$1.P$C1
  Top 0.15: C5.1 28.78,31.06
DEC3
  Top 0.152: U$1.P$D23 36.51,31.37 36.59,31.45 38.39,31.45
  Top 0.229: 38.71,31.46 38.71,31.13 38.39,31.45
  Top 0.3: 38.71,31.46 38.53,31.64 C11.1
DEC4_6  (via drill 0.18, 0.35)
  Top 0.127: 33.65,32.36 33.71,31.92 v36.25,31.92
  Top 0.152: 33.65,32.36 33.58,32.36 33.44,32.5 33.45,32.51 33.45,32.73 33.44,32.75 33.45,32.76 C16.1
  Top 0.178: C16.1 32.71,32.95 32.05,32.95 31.86,32.76 31.86,32.54 U$1.P$B5 | U$1.P$E24 37.01,31.12 v37.5,30.63 | C15.1 29.82,34.46 28.63,34.46 28.63,34.11 L3.2
  Top 0.229: C10.1 38.06,30.08 v37.5,30.63
  Top 0.3: L3.2 29.95,33.61 U$1.P$B5
  Bottom 0.15: v36.25,31.92 37.94,31.07 arc-217 v37.5,30.63
DN  (via drill 0.35)
  Top 0.127: J4.A7 25.07,10.33 | 25.07,10.33 v25.07,10.95 | J4.B7 24.49,10.89 25.07,10.33
  Top 0.229: 27.62,13.13 v27.62,14.14
  Top 0.3: D3.1 29.6,14.14 28.63,14.14 27.62,13.13
  Bottom 0.3: v27.62,14.14 27.62,13.73 25.48,11.59 25.48,11.36 v25.07,10.95 25.07,10.58
DP  (via drill 0.35)
  Top 0.127: J4.A6 24.73,9.82 24.73,9.32 24.84,9.21 25.3,9.21 25.41,9.32 25.41,9.82 J4.B6 v25.96,11.08
  Top 0.178: D3.3 29.6,11.6
  Top 0.3: 29.6,11.6 v28.63,11.6
  Bottom 0.3: v28.63,11.6 26.61,11.6 v25.96,11.08
EPD_3V3  (via drill 0.35)
  Top 0.178: J1.15 10.71,8.35 10.71,8.03 10.57,7.9 7.95,7.9 3.42,3.38 | 8.82,13.63 8.82,14.54 8.34,15.01
  Top 0.3: Q1.3 19.57,22.86 16.59,19.88 9.08,19.88 8.47,20.49 C1-EP-DR.1 L5.1 8.34,15.01 | EPD_C5.1 3.3,3.38 3.42,3.38 | J1.16 J1.15 10.83,11.58 v10.85,11.6 v10.84,11.6 | v10.04,12.87 9.58,12.87 8.82,13.63
  Bottom 0.3: v10.84,11.6 10.04,12.39 v10.04,12.87
GDR  (via drill 0.35)
  Top 0.152: J1.2 4.45,8.6 4.45,8.92 4.5,8.97 4.5,9.06 3.3,9.06
  Top 0.178: 17.24,16.37 18.2,17.33
  Top 0.3: 3.3,9.06 v3.23,9.13 | v15.93,15.41 16.93,16.41 R2_EP_DR.2 17.24,16.37 | 18.2,17.33 Q3.1
  Bottom 0.3: v15.93,15.41 10.85,15.41 9.44,14 9.44,11.39 7.48,9.43 3.53,9.43 v3.23,9.13
GND  (via drill 0.18, 0.23, 0.35)
  Top 0.127: 21.89,12.34 21.89,10.38 | 21.89,10.38 21.37,10.38 | IC1.D2 21.19,28.76 21.19,28.27 | 21.89,10.38 21.89,10.25 J4.A1_B12 | J2.3 J2.5
  Top 0.15: C23.1 3.59,28.69 | v17.2,11.6 17.2,12.36 SJ1.1 18.42,13.58 18.42,13.77 18.79,13.89 20.02,13.89 R_TYPE_SEL.1 | C5.2 30.15,31.11 31.73,31.11 | v15.93,30.98 C25.2
  Top 0.152: IC3.8 13.76,27.74 13.76,27.88 14.32,28.45 | 14.32,28.45 14.41,28.36 14.37,28.32 v14.33,28.62 | 14.32,28.45 v13.9,28.36 | v16.21,30.14 15.93,29.56 15.93,29.38 C39.2 16.91,29.86 | 31.94,31.47 U$1.P$B7 | 29,26.84 C20.2 | 11.71,8.03 11.71,8.35 J1.17 | J1.8 7.45,8.6 7.45,8.92 9.34,10.81 | 21.01,9.37 J4.A1_B12 | C32.1 35.11,11.15 | v39.3,8.55 39.88,7.91 C29.1 | 37.47,11.15 IC2.B1 | C9.2 37.63,24.16 38.03,23.28 v37.77,23.03 | 39.13,24.22 38.53,23.62 37.86,24.3 | 40.33,23.91 40.72,24.3 44.79,20.23 44.38,16.04 | 40.33,23.91 40.19,23.77 39.5,23.77 39.37,23.91 39.37,23.98 C3.2 | 40.33,23.91 40.33,24.7 39.83,25.19 | 31.58,24.25 30.66,23.34 29.44,23.34 29.14,23.03 28.07,23.03 27.31,23.79 | 20.05,32.17 18.89,31.02 18.46,31.02 18.09,30.65 | v36,23.28 C8.2 35.74,24.16 35.74,23.99 35.6,23.86 34.66,23.86 34.21,24.3 C7.2 33.89,24.16 33.94,23.99 34.73,23.54 34.73,23.28 v34.98,23.03 | 31.8,24.3 32.25,23.54 32.44,23.35 v33.28,23.46
  Top 0.178: 3.59,28.69 4.05,28.62 5.02,29.21 5.02,29.57 C24.2 | v10.85,31.67 11.59,31.39 11.25,31.73 IC9.C3 IC9.C2 IC9.C1 8.98,31.93 IC9.B1 8.06,32.53 7.46,31.92 | v10.86,29.37 11.56,29.37 13.21,27.69 | C17.1 20.9,33.55 20.9,33.38 21.03,33.25 21.44,33.25 v21.7,32.99 | C2.2 43.61,30.91 43.61,30.75 43.3,30.43 42.45,30.43 X1.2 41.46,30.43 41.39,30.43 40.73,31.09 | 38.39,29.62 38.29,29.52 37.82,29.52 37.32,30.02 | 38.39,29.62 38.42,29.66 38.42,29.83 C10.2 | 27.66,26.43 27.26,26.84 C6.2 26.42,26.67 26.42,26.59 26.6,25.57 24.06,25.57 23.21,26.76 | 27.66,26.43 27.79,26.31 28.48,26.31 29,26.84 | 12.62,9.59 11.83,8.8 | 6.65,2.08 6.12,1.56 5.44,1.56 4.07,2.92 | 9.4,3.19 8.87,3.72 8.18,3.72 8.05,3.59 8.05,3.35 EPD_C6.2 | 13.39,2.97 13.68,3.26 13.68,3.59 13.97,3.88 | 11.71,8.03 11.13,7.46 | 12.49,11.6 11.51,12.58 | R_TYPE_SEL.1 21.21,12.95 21.28,12.95 21.89,12.34 | 23.37,13.14 C27.1 23.37,21.01 | 28.24,2.71 C42.2 | J4.SH2 31.17,7.28 | R2_USB.2 31.37,7.71 31.44,7.71 31.52,7.79 C30.1 | C31.1 35.36,7.08 36.43,6 36.43,4.48 36.27,4.31 36.27,3.9 | 28.87,9.13 J4.A12_B1 | D3.2 29.5,12.45 28.63,12.45 | 31.65,8.4 34.42,8.4 35.02,7.79 C31.1 | C31.1 34.89,8.81 v34.98,8.55 | SW_DN.1 42.62,6.01 42.62,6.91 v42.17,7.36 | 36.68,8.9 37.33,9.31 37.33,10 37.69,10.36 | 19.55,25.77 C37.1 19.59,24.87 19.59,24.69 21.77,22.51 | 19.55,26.87 19.9,27.22 20.6,27.91 20.83,27.91 21.19,28.27 21.19,27.6 C18.1 | U3.9 23.17,22.14 23.17,22.22 22.94,22.45 | U3.9 23.17,21.38 23.17,21.3 22.88,21.01 | U3.9 23.93,22.14 23.93,22.72 24.57,23.36 | 39.81,28.21 38.39,29.62 | 34.02,33.55 v34.22,34.21 | 33.51,11.6 C32.1 | 27.66,26.43 27.31,26.08 | 44.38,16.04 41.2,16.04 J2.5
  Top 0.178: 36.72,30.76 37.32,30.15 | v31.93,34.46 31.93,33.87 C15.2
  Top 0.203: 16.34,25.77 16.34,23.59
  Top 0.229: 18.01,29.38 C38.1 | C10.2 38.57,30.39 | 10.3,3.19 10.99,3.88 | 31.03,7.51 J4.SH4 28.87,9.13 | 35.11,11.15 37.47,11.15 | 16.03,25.77 R3.1 | 30.81,13.58 30.81,13.43 30.36,12.97 | 36.3,30.76 36.72,30.76 | 37.32,30.15 37.32,30.02 | 16.34,23.59 13.04,23.59
  Top 0.254: 41.68,10.13 C34.1
  Top 0.3: C24.2 7.46,31.92 | 13.21,27.69 IC3.9 13.29,27.6 13.59,27.6 IC3.8 | C17.1 20.46,33.4 v19.74,33.4 | 17.7,29.75 C33.2 18.09,30.65 | 17.7,29.75 17.59,29.86 16.91,29.86 | 17.7,29.75 17.7,29.38 18.01,29.38 18.02,29.38 18.02,28.73 v18.27,28.47 | C2.2 43.98,31.06 44.26,30.46 C1.2 | C13.2 39.04,32.42 C11.2 | C11.2 39.88,31.09 X1.4 40.73,31.09 | 35.69,30.87 35.54,30.87 35.54,30.8 35.39,30.65 35.39,30.04 U$1.P$82 | 35.69,30.87 U$1.P$F23 36.3,30.76 | 38.57,30.39 39.57,31.39 C11.2 | C12.2 40.14,33.45 40.14,33.22 39.04,32.12 C11.2 | 31.94,31.47 U$1.P$75 31.73,31.11 | C14.2 24.13,33.53 v24.82,33.7 | C18.1 23.21,26.76 | C19.2 11.21,21.84 D4.1 | C1-EP-DR.2 9.94,20.49 D4.1 | J1.17 11.83,8.8 | 12.62,9.59 EPD_C1.2 12.49,11.6 | 6.65,2.08 EPD_C6.2 | 9.4,3.19 EPD_C7.2 10.3,3.19 | 13.39,2.97 13.13,2.97 12.91,3.19 EPD_C8.2 12.24,3.86 12.12,3.98 12.02,3.88 10.99,3.88 | EPD_C9.2 15.16,3.48 14.76,3.88 13.97,3.88 | EPD_C12.2 18.14,2.56 EPD_C10.2 16.74,1.8 EPD_C11.2 16.74,2.33 16.55,2.52 16.55,2.96 16.19,3.32 15.69,3.32 15.57,3.19 EPD_C9.2 | J1.MP2 17.09,6.79 R1_USB.1 | R1_USB.1 19.74,8.06 19.74,9.06 20.45,9.06 20.45,9.31 J4.SH3 20.45,9.47 21.37,10.38 | EPD_C9.2 15.16,4.87 J1.MP2 | J1.MP1 3.23,5.64 3.23,3.98 v3.2,4.01 | 4.07,2.92 EPD_C5.2 4.07,2.85 v3.78,2.46 | J1.MP2 15.35,5.83 v14.66,6.52 | v10.99,7.46 11.13,7.46 | 9.34,10.81 EPD_C2.2 9.98,11.6 10.96,12.58 11.51,12.58 | 23.37,13.14 R_TYPE_SEL.1 25.82,13.14 TP_GND.TP 28.63,12.45 28.62,12.45 | R2_EP_DR.1 v17.2,17.95 | 28.24,2.71 29.9,2.71 30.26,2.35 C43.2 30.26,2.81 SW_UP.1 30.55,3.59 29.83,4.31 29.83,4.56 J4.SH2 | 31.17,7.28 R2_USB.2 31.03,7.51 | 36.27,3.9 SW_ENT.1
  Top 0.3: R1_USB.1 18.52,6.75 18.72,6.75 20.22,5.25 J4.SH1 | C30.1 32.25,7.79 31.65,8.4 | v40.25,9.25 40.06,9.44 40.06,9.99 39.72,10.33 IC2.B3 39.77,10.33 39.98,10.13 41.68,10.13 | 36.68,8.9 v36.57,8.9 | IC2.B1 38.22,10.33 38.19,10.36 37.69,10.36 | C9.2 37.86,24.3 | C3.2 39.13,24.22 | 40.72,24.3 L1.2 C4.1 42.4,24.4 42.85,24.4 C4.2 C22.1 44.38,24.4 44.68,24.4 C22.2 | 19.55,26.87 19.55,25.77 19.46,25.77 18.7,25.01 16.97,25.01 16.64,25.34 16.64,25.47 16.34,25.77 16.03,25.77 | 39.83,25.19 ANT1.1 39.81,26.84 39.81,28.21 | 21.77,22.51 U3.1 22.62,22.45 22.94,22.45 | 22.88,21.01 U3.4 23.37,21.01 | U3.6 23.8,21.51 U3.9 | 24.57,23.36 TP_BAT_GND.TP | 31.73,28.67 31.73,27.6 | 31.73,28.67 U$1.P$83 | 31.73,28.67 U$1.P$74 | 31.73,27.6 32.8,27.6 U$1.P$88 32.95,27.6 34.02,27.6 U$1.P$89 34.17,27.6 35.23,27.6 U$1.P$90 | 31.73,27.6 U$1.P$87 | U$1.P$84 32.8,28.82 32.64,28.97 U$1.P$74 | U$1.P$74 33.56,29.28 34.02,28.82 U$1.P$85 34.17,28.82 35.23,28.82 U$1.P$86 | 31.73,31.11 31.73,30.04 U$1.P$79 | U$1.P$80 32.8,30.04 U$1.P$74 | U$1.P$81 34.02,29.89 33.56,29.43 U$1.P$74 | U$1.P$74 32.19,30.65 32.34,30.65 32.8,31.11 U$1.P$76 32.95,31.26 34.02,31.26 U$1.P$77 | 35.69,30.8 35.39,31.11 U$1.P$78 | 31.73,31.11 U$1.P$74 | 35.69,30.8 U$1.P$74 | 35.69,30.8 35.69,30.87 | C16.2 34.02,33.55 | R9.1 20.91,32.17 20.05,32.17 | 33.51,11.6 33.51,14.09 33.1,14.5 31.73,14.5 30.81,13.58 | 30.36,12.97 30.05,12.97 D3.2 | 27.31,26.08 27.31,23.79 | 31.58,24.25 C21.2 31.8,24.3 | 19.9,27.22 v19.9,27.29 | 13.04,23.59 D4.1
  Bottom 0.152: 40,7.79 v39.3,8.55 | 16.46,27.29 16.38,27.29 15.93,26.83 15.93,25.57 | v36,23.28 v37.77,23.03 | v33.28,23.46 v34.98,23.03
  Bottom 0.178: v13.9,28.36 14.32,28.45 14.99,27.78 | 21.01,32.13 v19.74,33.4 | v15.93,30.98 15.93,30.14 16.21,29.86 | 39.63,8.63 v39.3,8.55 39.3,8.09 37.21,8.09 | v16.21,30.14 16.18,29.74 | 19.69,33.39 9.63,33.39 9.33,33.09 9.33,32.02 | 15.05,27.78 14.51,28.32 v14.33,28.62 | v19.9,27.29 18.68,27.29 18.27,27.7 v18.27,28.47 | 16.46,27.29 16.88,27.7
  Bottom 0.229: 19.74,14.14 v17.2,11.6 | 39.63,8.63 v40.25,9.25
  Bottom 0.3: v10.85,29.38 v10.85,31.67 10.85,32.02 9.33,32.02 | 8.31,24.3 9.98,25.97 10.1,25.97 10.88,26.75 10.88,27.79 10.85,27.81 v10.85,29.38 | v10.85,29.38 v10.86,29.37 | 16.21,29.86 v16.21,30.14 | v34.22,34.21 33.82,33.83 33.08,33.83 32.78,33.53 v31.93,34.46 31.58,33.55 24.57,33.55 v24.82,33.7 22.23,33.53 v21.7,32.99 | v3.2,4.01 3.23,3.98 3.23,2.71 3.63,2.71 v3.78,2.46 | v14.66,6.52 12.12,6.52 10.85,7.79 10.85,7.6 v10.99,7.46 | v17.2,17.95 19.74,17.95 22.28,15.41 21.01,14.14 19.74,14.14 | v42.17,7.36 41.74,7.79 40,7.79 | v34.98,8.55 36.4,9.06 v36.57,8.9 36.45,8.86 37.21,8.09 | 16.18,29.74 15.88,29.43 15.93,29.38 15.93,29.29 16.04,29.17 16.04,28.3 16.02,28.28 | 19.69,33.39 v19.74,33.4 | 14.99,27.78 15.05,27.78 15.53,27.78 16.02,28.28 | 16.02,28.28 16.53,28.28 16.88,27.92 16.88,27.7
  pour Top: 32.38,1.54 32.42,1.55 36.27,1.55 36.31,1.54 36.35,1.5 36.36,1.46 36.36,-0.99 41.28,-0.99 46.3,4.03 46.3,31.87 42.55,35.62 4.55,35.62 -0.47,30.6 -0.47,24.41 5.79,24.41 5.83,24.4 5.87,24.36 5.88,24.32 5.88,11.58 5.87,11.54 5.83,11.5 5.79,11.49 -0.47,11.49 -0.47,4.03 4.55,-0.99 10.74,-0.99 10.74,1.46 10.75,1.5 10.79,1.54 10.83,1.55 13.41,1.55 13.45,1.54 13.49,1.5 13.5,1.46 13.5,-0.99 20.9,-0.99 20.9,1.46 20.91,1.5 20.95,1.54 20.99,1.55 24.84,1.55 24.88,1.54 24.92,1.5 24.93,1.46 24.93,-0.99 32.33,-0.99 32.33,1.46 32.34,1.5
IMU_INT1  (via drill 0.18, 0.35)
  Top 0.15: IC3.5 14.26,26.69 14.41,26.69 14.42,26.7 16.27,26.7 16.36,26.79 v16.61,26.79 | U$1.P$N1 v28.12,29.08
  Bottom 0.15: v28.12,29.08 26.6,29.63 24.82,28.11 22.74,26.29 17.11,26.29 v16.61,26.79 | v16.61,26.79
IMU_INT2  (via drill 0.23, 0.35)
  Top 0.127: U$1.P$P2 30.94,28.62 30.94,27.86 24.06,28.54
  Top 0.15: v23.55,28.62 24.06,28.54 | v18.47,26.84 17.2,28.11 16.42,27.33 16.42,27.24 16.16,26.98 15.78,26.98 15.67,27.09 IC3.6
  Bottom 0.15: v23.55,28.62 22.28,28.62 21.01,26.84 v18.47,26.84
LX1
  Top 0.15: IC9.B2 IC9.B3 11.25,32.13 12.52,33.4 13.79,33.4 14.19,33.8 15.18,33.8 L7.1
LX2  (via drill 0.18, 0.35)
  Top 0.15: IC9.D2 IC9.D3 12.52,30.9 12.52,31.92 v13.39,31.92 | v17.3,31.92 18.19,32.81 L7.2
  Bottom 0.15: v13.39,31.92 v17.3,31.92
N$3
  Top 0.15: C9.1 37.26,26.45 37.69,26.87 37.69,28.12 U$1.P$N24
N$4
  Top 0.127: 38.53,28.02 U$1.P$H23
  Top 0.15: L1.1 39.72,24.3 39.04,24.98 38.68,24.61 38.68,24.44 C3.1 38.53,28.02
N$5  (via drill 0.35)
  Top 0.15: v40.06,28.87 40.06,29.49 X1.1 40.73,29.94 41.82,28.85 C1.1 | U$1.P$B24 v37.86,31.91
  Bottom 0.15: v40.06,28.87 38.23,31.21 37.86,31.58 v37.86,31.91
N$8  (via drill 0.35)
  Top 0.15: C2.1 41.99,31.06 X1.3 42.6,31.73 v42.6,31.92 | U$1.P$A23 36.22,32.62 36.39,32.45 37.59,32.45 v37.67,32.53
  Bottom 0.15: v37.67,32.53 37.85,32.36 42.16,32.36 v42.6,31.92
N$13
  Top 0.15: C13.1 37.24,33.66 34.87,33.66 34.56,33.36 34.56,33.02 34.69,32.89 U$1.P$A18
N$15
  Top 0.15: L2.1 25.72,33.61 26.25,33.08 26.93,33.08 27.16,33.3 27.56,33.3 27.79,33.08 28.71,33.08 29.67,32.68 U$1.P$B3
N$16
  Top 0.15: L2.2 27.36,34.38 L3.1
N$19
  Top 0.15: C20.1 28.26,26.84 29.01,27.35 29.39,27.35 30.11,26.63 U$1.P$AC5
N$20  (via drill 0.35)
  Top 0.15: L5.2 C2-EP-DR.2 9.91,14.14 10.54,14.77 11.88,14.77 12.51,14.14 v14.15,13.12 D5.2 | v19.74,16.68 Q3.3
  Bottom 0.15: v19.74,16.68 17.2,14.14 v14.15,13.12
N$21  (via drill 0.35)
  Top 0.127: IC9.D1 8.31,30.65
  Top 0.15: v10.17,29.97 10.72,29.89 R4.2 | v8.31,31.92 8.31,30.65
  Bottom 0.15: v10.17,29.97 9.58,30.56 9.58,30.65 v8.31,31.92
N$22  (via drill 0.15, 0.23)
  Top 0.15: R9.2 21.2,31.46 21.52,31.46 22.28,30.69 v22.33,30.4 | IC1.D1 20.58,28.55 v20.5,28.52
  Bottom 0.15: v20.5,28.52 20.55,28.52 20.14,28.11 20.14,28.63 21.59,30.08 21.71,30.08 v22.33,30.4
N$23  (via drill 0.35)
  Top 0.15: D4.2 13.44,20.49 v13.39,20.49 | v12.12,19.22 12.12,18.43 D2.1 v10.34,17.95 | v8.47,12.87 8.34,13 C2-EP-DR.1
  Bottom 0.15: v13.39,20.49 v12.12,19.22 | v10.34,17.95 8.31,15.41 8.31,13.03 v8.47,12.87
N$24  (via drill 0.18, 0.35)
  Top 0.127: IC9.E1 8.49,30.24
  Top 0.15: v7.8,30.53 8.49,30.24
  Top 0.178: v10.09,27.35 v10.08,27.35 R2.2
  Bottom 0.15: v10.09,27.35 9,29.72 v7.8,30.53
N$25
  Top 0.15: J1.4 5.52,8.8 5.78,9.06 7.04,9.06 8.33,11.58 | 8.21,11.43 8.33,11.58 | 8.33,11.58 EPD_C2.1
N$26
  Top 0.15: 20.65,12.73 20.51,12.87 SJ1.2 | R_TYPE_SEL.2 20.87,12.73 20.65,12.73 | R1_EP_DR.1 19.74,14.41 18.64,15.51 16.6,13.47 16.6,11 17.7,9.9 20.53,12.73 20.65,12.73
N$27  (via drill 0.35)
  Top 0.15: IC3.1 12.14,25.57 v12.12,25.57 | R3.2 15.67,25.29 v15.3,24.93
  Bottom 0.15: v12.12,25.57 14.66,25.57 v15.3,24.93
N$28
  Top 0.15: J1.18 12.21,8.35 12.21,7.82 11.24,6.85 10.32,6.85 8.97,5.5 8.97,5.28 EPD_C6.1
N$29  (via drill 0.35)
  Top 0.15: J1.19 12.71,8.35 12.71,6.62 11.34,5.25 v9.58,5.25 | v8.31,2.2 8.31,2.97 EPD_C7.1
  Bottom 0.15: v9.58,5.25 9.58,3.98 v8.31,2.2
N$30  (via drill 0.35)
  Top 0.15: J1.20 13.33,6.46 v12.12,5.25 | v11.24,2.46 EPD_C8.1
  Bottom 0.15: v12.12,5.25 12.12,4.24 10.85,2.97 10.94,2.97 v11.24,2.46
N$31  (via drill 0.35)
  Top 0.15: v5.83,7.73 J1.5 | EPD_C1.1 11.62,11.1 11.44,10.92 v11.44,10.71
  Bottom 0.15: v5.83,7.73 5.89,7.79 6.61,7.79 9.53,10.71 v11.44,10.71
N$32  (via drill 0.35)
  Top 0.15: EPD_C10.1 17.14,5.19 v17.2,5.25 | v15.93,6.86 15.86,6.93 15.11,6.93 14.33,7.71 J1.22
  Bottom 0.15: v17.2,5.25 15.93,6.52 v15.93,6.86
N$34  (via drill 0.35)
  Top 0.15: EPD_C12.1 17.22,1.44 17.25,1.47 v17.52,1.47 | v16.21,7.79 16.02,7.79 J1.24
  Bottom 0.15: v17.52,1.47 17.52,4.71 17.81,5 17.81,5.91 16.21,7.51 v16.21,7.79
N$35
  Top 0.15: C32.2 35.24,11.6 37.27,13.12 40.21,12.52 39.04,11.1 IC2.A2
N$38  (via drill 0.35)
  Top 0.15: v31.17,9.06 R2_USB.1 | J4.B5 26.57,8.27 v26.09,7.79
  Bottom 0.15: v26.09,7.79 31.17,7.79 v31.17,9.06
N$42  (via drill 0.35)
  Top 0.127: 23.55,9.96 J4.A5
  Top 0.15: 23.55,9.96 23.55,7.79 v21.01,7.79 | v18.47,5.5 R1_USB.2
  Bottom 0.15: v21.01,7.79 19.74,6.52 18.47,6.52 v18.47,5.5
OUT+
  Top 0.3: TP_OP.TP 41.92,11.6 41.5,12.02 40.48,12.02 IC2.A3
OUT-
  Top 0.3: IC2.C3 39.45,9.67 39.45,9.19 40,8.64 40.5,8.64 40.92,9.06 TP_ON.TP
P0.00/XL1  (via drill 0.23, 0.35)
  Top 0.127: 28.92,31.82 30.54,31.88 U$1.P$D2
  Top 0.15: C17.2 21.85,33.69 22.3,33.24 22.3,32.24 v22.23,32.17 | X2.1 v24.73,31.92
  Top 0.152: v28.12,31.92 28.92,31.82
  Bottom 0.15: v28.12,31.92 27.24,32.53 25.82,32.53 25.21,31.92 v24.73,31.92 24.72,31.87 23.5,31.87 23.5,31.92 22.49,31.92 v22.23,32.17
P0.01/XL2  (via drill 0.18, 0.23, 0.35)
  Top 0.127: 27.37,30.21 30.02,30.21 U$1.P$F2
  Top 0.15: v27.37,30.64 27.37,30.21 | v27.11,31.92 X2.2 | 23.04,28.43 23.1,28.3 23.1,27.92 23.8,27.21 C18.2
  Top 0.178: v24.79,31.16 v23.04,30.14 | v23.04,29.13 23.04,28.75 23.04,28.43
  Bottom 0.15: v24.79,31.16 26.09,31.92 v27.11,31.92 v27.37,30.64
  Bottom 0.178: v23.04,30.14 v23.04,29.13
P0.13/1.5D  (via drill 0.23, 0.35)
  Top 0.15: SW_UP.2 33.58,3.85 33.71,3.98 33.71,4.13 33.36,4.48 33.36,4.73 33.33,6.53 C30.2 v34.4,7.79 | R5.1 33.64,10.21 33.09,9.66 33.44,9.31 33.46,9.31 v33.2,9.31
  Bottom 0.15: v33.2,9.31 33.71,7.79 v34.4,7.79
P0.14/1.5D
  Top 0.15: SW_ENT.2 38.75,4 38.27,4.48 38.27,7.22 37.7,7.79 C31.2 35.23,9.31 32.69,8.73 32.19,10.84 36.35,10.58 R8.1
P1.01/1.6C
  Top 0.15: R_PWR_EPD.1 18.79,20.45 Q1.1
P1.02/1.6C
  Top 0.15: R7.1 38.99,7.87 39.06,7.87 39.3,7.28 41.51,7.28 C29.2 40.47,7.79 41.08,8.4 41.58,8.4 41.94,8.04 42.35,8.04 43.19,7.2 43.19,5.11 43.2,5.1 43.2,5 SW_DN.2
PMIC_INT  (via drill 0.18, 0.2)
  Top 0.15: U$1.P$T2 28.63,28.62 v24.82,28.87
  Top 0.178: v19.74,30.4 IC1.A1
  Bottom 0.15: v24.82,28.87 26.17,29.89 21.26,31.16 v19.74,30.4
PREVGH  (via drill 0.35)
  Top 0.3: D5.1 13.83,11.52 J1.21 13.83,5.69 v13.39,5.25 | v14.38,2.46 14.3,3.19 EPD_C9.1
  Bottom 0.3: v13.39,5.25 13.39,4.24 14.38,3.25 v14.38,2.46
PREVGL  (via drill 0.35)
  Top 0.178: 14.66,15.41 15.3,14.77 15.38,14.77 15.51,14.63 15.51,13.64 14.83,12.96
  Top 0.3: EPD_C11.1 15.74,2.52 v15.93,2.71 v15.94,2.71 | v15.3,7.6 14.83,8.07 J1.23 14.83,12.96 | 14.66,15.41 14.66,17.47 D2.2
  Bottom 0.3: v15.94,2.71 15.3,3.35 v15.3,7.6
RESE  (via drill 0.35)
  Top 0.15: 22.28,16.03 22.28,13.86 R1_EP_DR.2
  Top 0.152: J1.3 4.71,8.35 4.71,8.03 4.5,7.82
  Top 0.178: 15.93,14.14 v15.93,10.33
  Top 0.229: Q3.2 16.8,14.14 15.93,14.14
  Top 0.3: v4.5,7.6 4.5,7.82 | 22.28,16.03 Q3.2
  Bottom 0.178: 5.77,6.52 9.35,10.1 11.69,10.1
  Bottom 0.3: 5.77,6.52 4.5,7.79 v4.5,7.6 | v15.93,10.33 11.92,10.33 11.69,10.1
RESET  (via drill 0.18, 0.35)
  Top 0.127: v34.47,25.06 34.49,25.57 34.98,25.57 34.98,26.35 34.47,26.84 33.56,26.84 33.44,26.72 U$1.P$AC13
  Top 0.15: J2.6 43.62,17.19 41.84,22.52 TP_RESET.TP v30.92,21.76
  Bottom 0.15: v34.47,25.06 32.19,23.03 30.92,23.03 v30.92,21.76
SCL/1.4C  (via drill 0.23, 0.35)
  Top 0.15: IC2.C1 38.02,9.83 v37.88,9.57 | U3.7 24.67,21.87 24.99,21.87 25.14,21.72 25.14,20.8 24.82,20.48 v24.82,19.22
  Bottom 0.15: v24.82,19.22 27.36,16.68 30.31,16.68 36,10.99 36.7,10.99 v37.88,9.57
SCL/2.4C  (via drill 0.35)
  Top 0.127: U$1.P$M2 30.43,29.91 24.82,29.76 21.01,29.35
  Top 0.15: R17.2 5.77,28.7 v5.57,28.5 | 9.83,26.59 9.63,26.79 | 9.83,26.59 v9.85,26.57 | 9.83,26.59 11.3,26.59 11.38,26.51 12.44,26.51 12.52,26.59 IC3.12 13.14,26.59 v13.39,26.84 | v13.21,28.55 13.79,29.13 13.79,29.64 13.46,29.97 R4.1 13.75,29.97 14.04,29.69 v14.1,29.69 | U$1.P$M2 | v15.44,28.56 15.61,28.39 17.32,28.39 17.97,27.74 18.63,27.74 19.67,28.77 19.67,28.87 20.25,29.18 20.74,29.51 IC1.B1 21.01,29.35 | v6.99,27.75 TP_SCL.TP
  Bottom 0.15: v5.57,28.5 5.92,28.15 8.27,28.15 8.46,27.96 | 8.46,27.96 v9.85,26.57 | v13.21,28.55 v13.21,28.54 13.39,28.36 v13.39,26.84 | v6.99,27.75 8.1,27.6 8.46,27.96 | v15.44,28.56 15.22,28.56 v14.1,29.69
SDA/1.4C  (via drill 0.23)
  Top 0.127: 38.76,10.33 38.15,11.51
  Top 0.15: U3.8 24.7,22.35 24.98,22.35 26.09,21.24 v26.09,20.49 | IC2.B2 38.76,10.33 | v37.52,11.6 38.15,11.51
  Bottom 0.15: v37.52,11.6 37.52,12.39 36.07,13.83 35.91,13.83 34.99,14.76 34.99,14.92 29.42,20.49 v26.09,20.49
SDA/2.4C  (via drill 0.18, 0.35)
  Top 0.127: 30.19,29.51 27.11,29.46 v26.85,29.13
  Top 0.15: TP_SDA.TP 5.38,26.49 R18.2 7.57,26.89 7.93,26.53 8.95,26.53 9.67,27.25 9.67,28.34 10.03,28.34 R2.1 11.36,28.38 v11.61,28.11 | v11.96,24.63 13.02,24.63 13.02,25.94 IC3.2 13.26,25.94 13.26,25.79 13.79,25.27 14.79,25.27 15.15,25.63 15.17,25.63 15.53,25.98 15.53,26.06 15.63,26.17 18.2,26.17 18.41,26.39 18.66,26.39 18.92,26.65 18.92,27.38 19.97,28.43 19.97,28.54 20.38,28.9 IC1.C1 | U$1.P$L1 30.19,29.51
  Bottom 0.15: v11.61,28.11 11.91,26.22 11.51,25.82 11.51,25.32 11.96,24.87 v11.96,24.63 14.74,24.63 15.05,24.32 21.67,24.3 v26.85,29.13
SWDCLK  (via drill 0.35)
  Top 0.127: 41.84,20.11 40.19,19.09
  Top 0.15: 38.03,16.17 J2.4
  Top 0.152: TP_SWDCLK.TP 32.44,16.68 33.71,15.41 36.03,13.55 36.93,13.55 38.15,14.65 38.03,16.17 | J2.4 40.19,19.09 | 41.84,20.11 v41.46,21.51
  Top 0.229: v37.21,27.25 U$1.P$AA24
  Bottom 0.178: v41.46,21.51 40.82,22.78 36.25,24.38
  Bottom 0.3: 36.25,24.38 36.25,26.84 36.53,27.12 v37.21,27.25
SWDIO  (via drill 0.35)
  Top 0.15: J2.2 37.32,18.71 31.26,20.4
  Top 0.152: J2.2 38.28,19.6 38.15,20.74 38.15,21.12 v38.03,21.51 | U$1.P$AC24 36.69,24.3 36.69,24.09 36.69,23.47 v36.5,22.65 | 31.26,20.4
  Top 0.229: 31.26,20.4 31.17,20.49 TP_SWDIO.TP
  Bottom 0.152: v36.5,22.65 v38.03,21.51
SWO  (via drill 0.23)
  Top 0.152: v35.49,25.57 35.28,25.79 35.32,25.79 35.65,26.12
  Top 0.178: 35.65,26.12 U$1.P$AD22
  Top 0.3: v29.9,25.57 TP_SWO.TP
  Bottom 0.178: v35.49,25.57 34.27,25.49 32.63,23.85 32.08,23.85
  Bottom 0.3: 32.08,23.85 v29.9,25.57
VBAT/1.2A  (via drill 0.25, 0.35)
  Top 0.127: C27.2 23.73,19.04 v24.31,18.46 | v22.28,19.22 22.46,19.22
  Top 0.178: 22.46,19.22 21.92,21.51 U3.3
  Top 0.3: U3.2 v21.77,21.84 22.59,21.81 22.59,21.51 U3.3 | TP_VBAT.TP 23.4,23.18 v23.4,23.05
  Bottom 0.127: v24.31,18.46 22.28,18.71 v22.28,19.22
  Bottom 0.3: v21.77,21.84 22.4,21.84 22.32,21.76 22.32,21.79 23.4,22.88 v23.4,23.05
VBAT/2.5C  (via drill 0.23)
  Top 0.127: 22.48,27.91 22.48,29.18 IC1.C2
  Top 0.178: C37.2 21.2,26.17 20.76,26.9 v22.28,26.71 | 22.48,27.91 v22.79,27.47
  Bottom 0.15: v22.28,26.71 22.49,27.9 v22.79,27.47
VBUS/1.5D  (via drill 0.35)
  Top 0.127: J4.A4_B9 22.73,10.29 22.73,10.63 23.55,11.45
  Top 0.152: J4.A9_B4 26.85,8.71 26.85,8.56 v27.36,3.98 | 29.65,10.76 D3.5
  Top 0.178: C42.1 26.63,1.47 26.63,1.78 | 29.65,10.76 27.22,10.76 J4.A9_B4 26.85,11.1
  Top 0.229: 23.55,11.6 26.6,11.6 26.85,11.1
  Top 0.3: v27.36,3.98 27.36,2.51 26.63,1.78 | v28.63,1.47 29.23,1.47 C43.1 | 23.55,11.45 23.55,11.6
  Bottom 0.3: v27.36,3.98 28.63,2.71 v28.63,1.47
VBUS/2.6D  (via drill 0.23, 0.35)
  Top 0.152: v18.93,30.61 20.24,31.67 19.99,31.41 20.25,31.16 IC1.A2
  Top 0.178: v28.99,26.02 29.26,26.02 30.66,26.08
  Top 0.254: C38.2 19.35,30.08 v18.93,30.61
  Top 0.3: C21.1 30.69,24.32 U$1.P$AD2 30.66,26.08
  Bottom 0.152: 23.9,30.9 28.12,29.89 | 29.65,28.32 28.58,26.5
  Bottom 0.178: 21.81,31.75 20.03,31.75 18.93,30.64 v18.93,30.61 | 22.53,31.26 23.9,30.9 | 28.12,29.89 29.65,28.32 | 28.58,26.5 28.99,26.09
  Bottom 0.3: 22.53,31.26 22.3,31.26 21.81,31.75 | 28.99,26.09 v28.99,26.02
VREG  (via drill 0.18, 0.35)
  Top 0.15: C23.2 4.69,30.69 4.06,31.31 TP_VREG.TP
  Top 0.152: v21.26,30.65 21.9,30.21 | v19.06,28.81 19.06,28.61 18.46,28.02 18.09,28.02 17.43,28.67 16.14,28.67 C39.1 | 21.88,30.19 IC1.B2
  Top 0.178: C24.1 6.38,33.07 7.51,34.2 IC9.A1 IC9.A2 IC9.A3 v11.21,32.77
  Top 0.229: 21.9,30.21 21.88,30.19
  Top 0.3: C24.1 5.76,31.31 TP_VREG.TP
  Bottom 0.152: 21.17,30.36 21.17,30.75 v21.26,30.65
  Bottom 0.178: v11.21,32.77 11.25,32.38 12.37,31.26 16.44,31.41 16.82,30.19 | 19.71,28.92 18.46,28.92 16.81,28.92
  Bottom 0.3: 16.82,30.19 16.82,29.59 16.73,29.5 16.73,29 16.81,28.92 | 21.17,30.36 20.81,30 20.8,30 19.71,28.92 19.6,28.81 v19.06,28.81